# Altium PCB DIOBoard3.PcbDoc
Units mil, origin at the board's own origin, x right, y up, seen from the top; angles counter-clockwise.
Board outline 3937.01 x 5905.51 mil, 2 copper layers (Top Layer, Bottom Layer); 9 components, 110 nets, 54 pads, 9 vias.
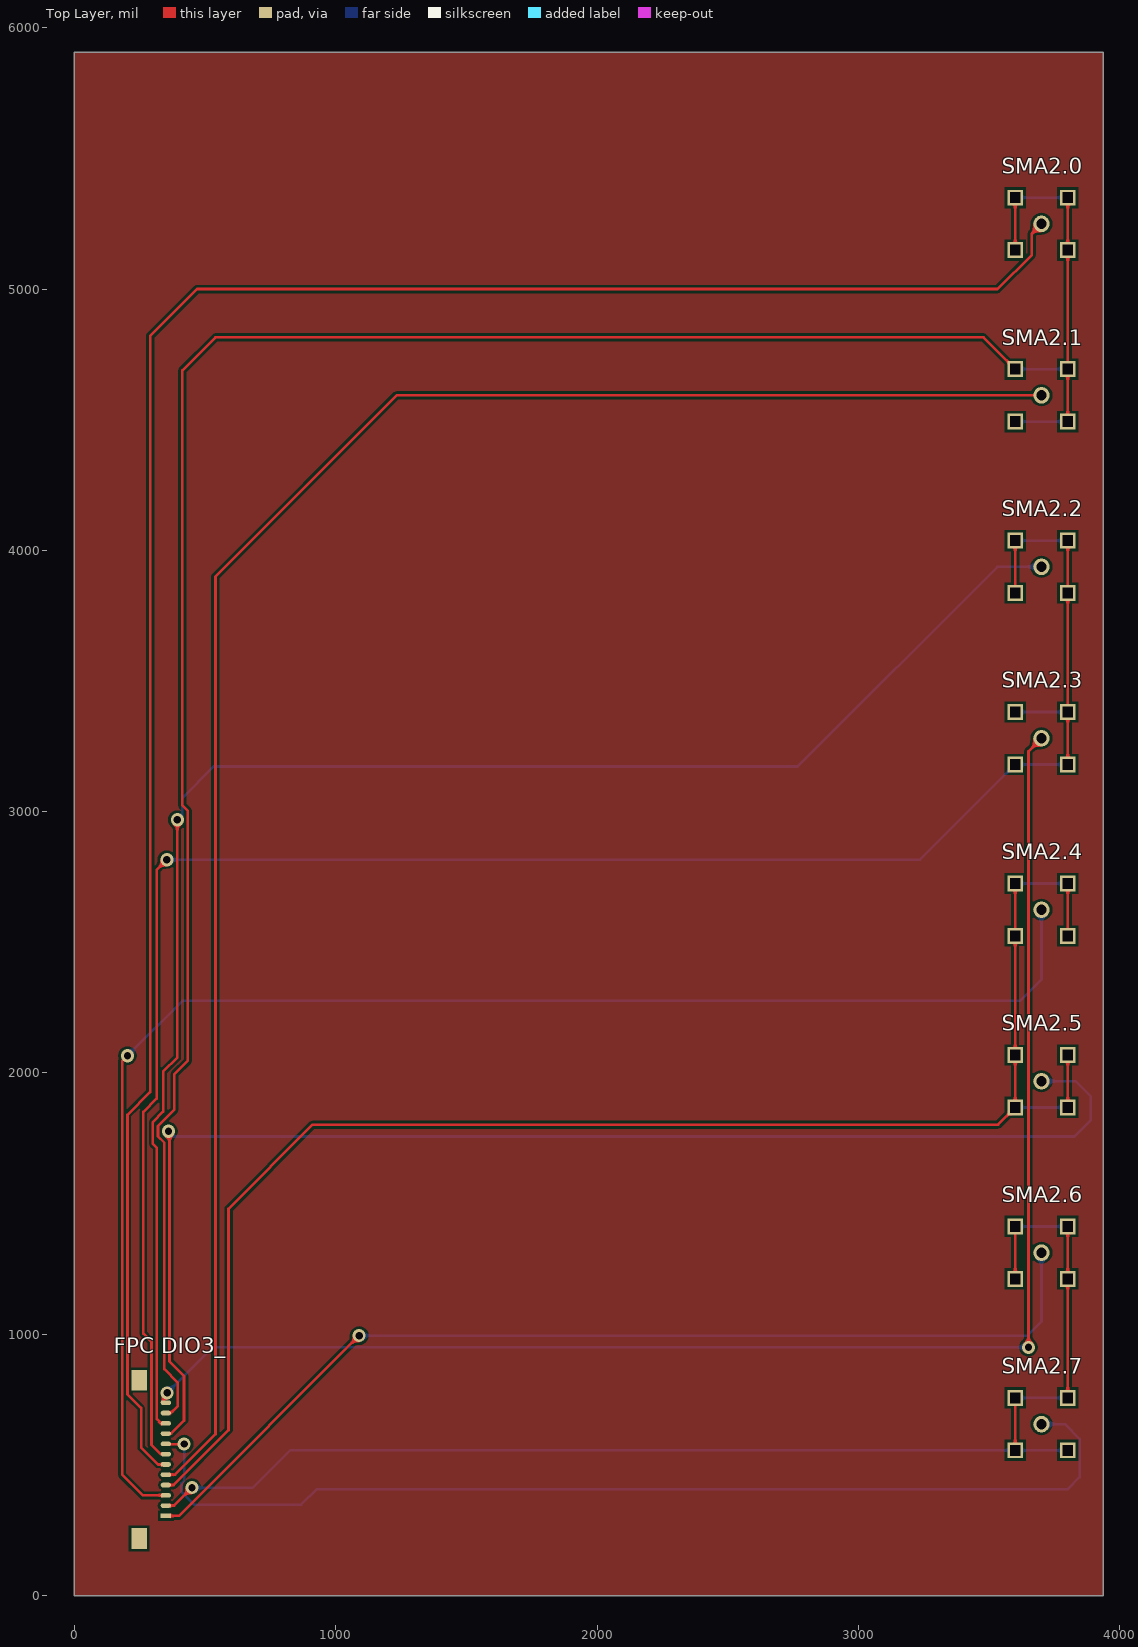
[diagram p0: Top Layer view]
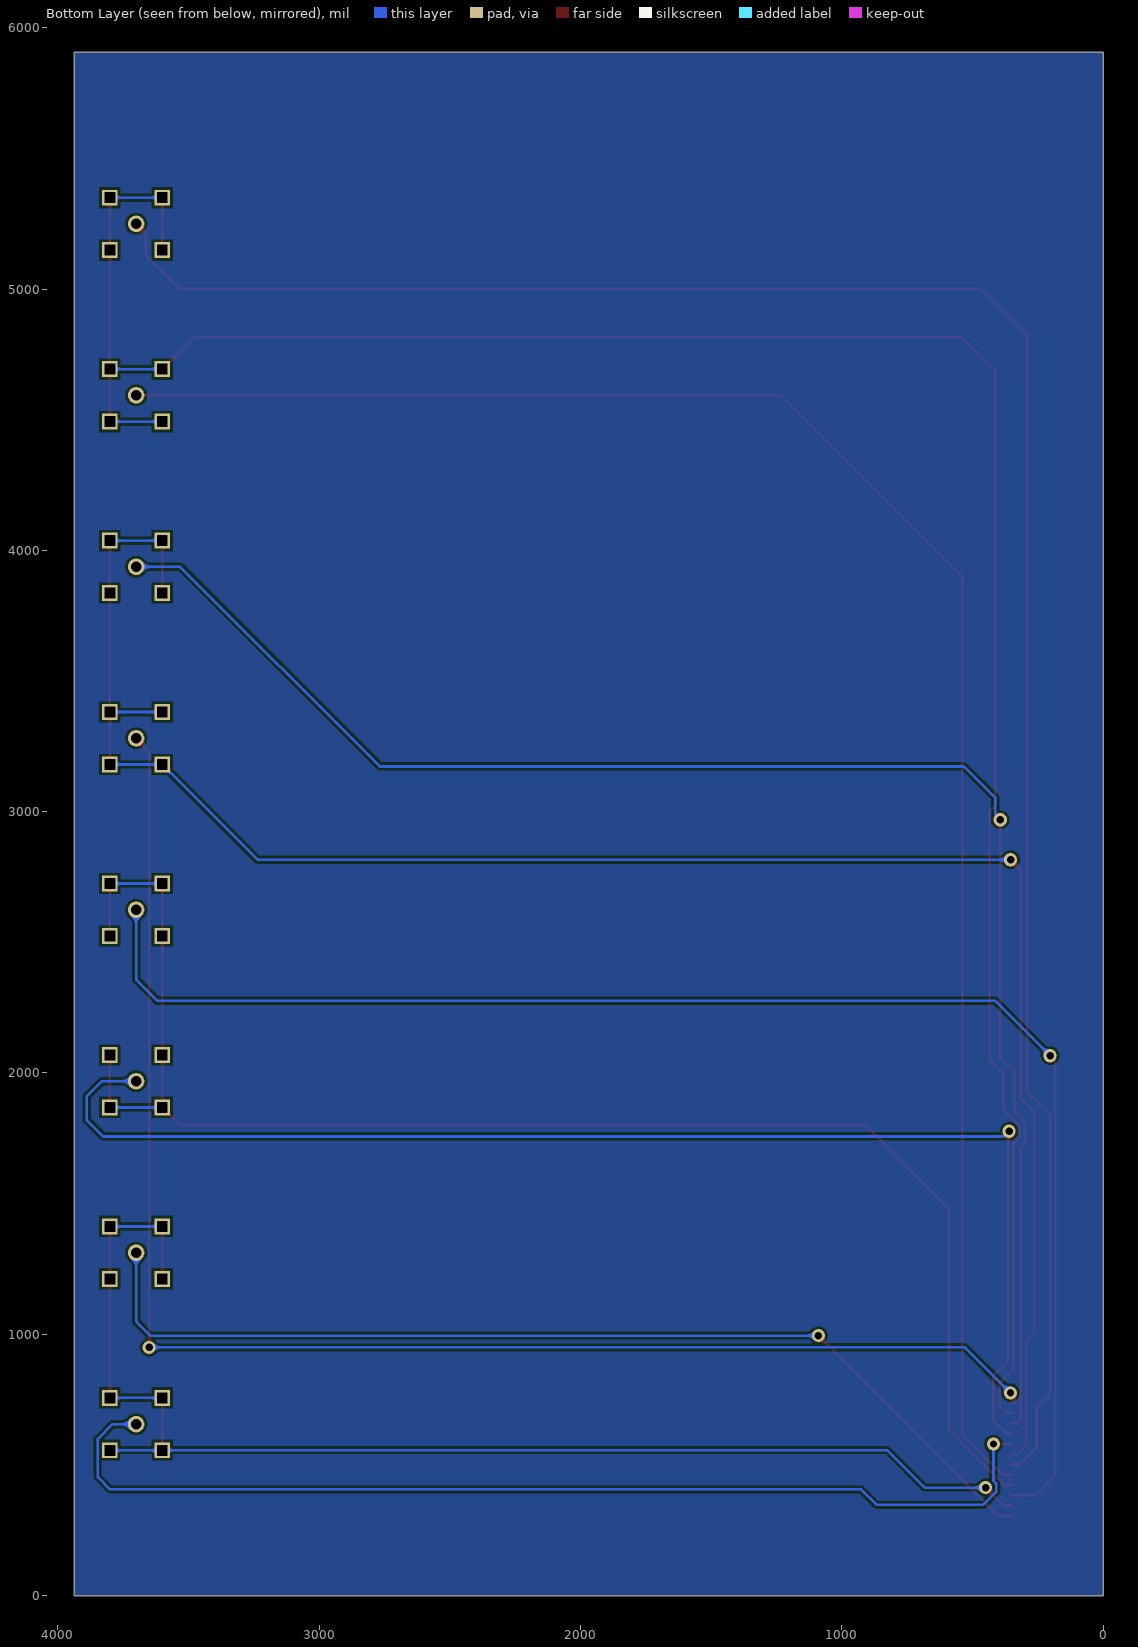
[diagram p1: Bottom Layer view, seen from below]

## Layer stack, top to bottom
Top Solder: solder mask 0.4, Solder Resist, Dk 3.5
Top Layer: signal copper 1.4
Dielectric 1: dielectric 12.6, FR-4, Dk 4.8
Bottom Layer: signal copper 1.4
Bottom Solder: solder mask 0.4, Solder Resist, Dk 3.5

## Board outline
0,0 3937.01,0 3937.01,5905.51 0,5905.51

## Design rules (kind name [scope] priority, off if disabled: settings)
Clearance [All] p1: gap=10 ignorepadtopadclearanceinfootprint=FALSE except(0: Arc-Hole Track-Hole SMDPad-Hole THPad-Hole Via-Hole Fill-Hole Poly-Hole Region-Hole Text-Hole)
PolygonConnect [All] p1: connectstyle=Relief reliefconductorwidth=10 reliefentries=4 polygonreliefangle="90 Angle" airgapwidth=10
RoutingVias [All] p1: holewidth=28 width=50 viastyle="Through Hole" minholewidth=28 minwidth=50 maxholewidth=28 maxwidth=50
SolderMaskExpansion [All] p1: expansion=4
Width [All] p1: maxlimit=10 minlimit=10 preferedwidth=10
30 further rules are at their usual default settings.

## Components (designator, comment, footprint, x,y, rotation, side; value= is the part's Value field where it differs from the comment)
"FPC DIO3_" "FPC socket 12 pin" "FPC 12pin" 350,305.12 r180 top
SMA2.0 "SMA" SMA 3700.78,5249.33 r0 top
SMA2.1 "SMA" SMA 3700.78,4593.16 r0 top
SMA2.2 "SMA" SMA 3700.78,3937 r0 top
SMA2.3 "SMA" SMA 3700.78,3280.83 r0 top
SMA2.4 "SMA" SMA 3700.78,2624.67 r0 top
SMA2.5 "SMA" SMA 3700.78,1968.5 r0 top
SMA2.6 "SMA" SMA 3700.78,1312.34 r0 top
SMA2.7 "SMA" SMA 3700.78,656.17 r0 top

## Footprints (in the part's own frame and the unit in brackets; to place one, negate y for a bottom-side part, rotate by r counter-clockwise, add the part's x,y. Pads: shape width x height; smd on the part's side, far side on the other; paste and mask are expansions set on the pad)
"FPC 12pin" [mm]
  rect 1x0.45 smd: 1(0,0)
  oval 1x0.45 smd: 2(0,-1) 3(0,-2) 4(0,-3) 5(0,-4) 6(0,-5) 7(0,-6) 8(0,-7) 9(0,-8) 10(0,-9) 11(0,-10) 12(0,-11)
  rect 1.5x2 smd: 13(2.6,-13.2) 14(2.6,2.2)
SMA [mm]
  round 1.6 hole 1: 1(0,0)
  rect 1.524x1.524 hole 1 square: 2(-2.55,-2.55) 2(-2.55,2.55) 2(2.55,-2.55) 2(2.55,2.55)

## Via types
v1: diameter 50, hole 28, Top Layer to Bottom Layer, 9 vias

## Nets (pads, with @x,y where several pads share a name; then routed paths per layer and width w, separated by ;. In a path a pad name is that pad's centre, name@x,y a point inside that pad or via, vN(x,y) a via of type N, cw(c..) or ccw(c..) an arc to the next point about the centre after c; other vN are vias at no path point)
Net5V_1: 
Net5V_2: 
NetC1_1: 
NetC1_2: 
NetC3_1: 
NetC3_2: 
NetC5_1: 
NetC5_2: 
NetC7_1: 
NetC7_2: 
"NetFPC AI1_1": 
"NetFPC AI1_2": 
"NetFPC AI1_3": 
"NetFPC AI1_4": 
"NetFPC AI1_5": 
"NetFPC AI1_6": 
"NetFPC AI1_7": 
"NetFPC AI1_8": 
"NetFPC AI1_9": 
"NetFPC AI1_10": 
"NetFPC AI1_11": 
"NetFPC AI1_12": 
"NetFPC AI2_1": 
"NetFPC AI2_2": 
"NetFPC AI2_3": 
"NetFPC AI2_4": 
"NetFPC AI2_5": 
"NetFPC AI2_6": 
"NetFPC AI2_7": 
"NetFPC AI2_8": 
"NetFPC AI2_9": 
"NetFPC AI2_10": 
"NetFPC AI2_11": 
"NetFPC AI2_12": 
"NetFPC AO_1": 
"NetFPC AO_2": 
"NetFPC AO_3": 
"NetFPC AO_4": 
"NetFPC DIO1_1": 
"NetFPC DIO1_2": 
"NetFPC DIO1_3": 
"NetFPC DIO1_4": 
"NetFPC DIO1_5": 
"NetFPC DIO1_6": 
"NetFPC DIO1_7": 
"NetFPC DIO1_8": 
"NetFPC DIO1_9": 
"NetFPC DIO1_10": 
"NetFPC DIO1_11": 
"NetFPC DIO1_12": 
"NetFPC DIO2_1": 
"NetFPC DIO2_2": 
"NetFPC DIO2_3": 
"NetFPC DIO2_4": 
"NetFPC DIO2_5": 
"NetFPC DIO2_6": 
"NetFPC DIO2_7": 
"NetFPC DIO2_8": 
"NetFPC DIO2_9": 
"NetFPC DIO2_10": 
"NetFPC DIO2_11": 
"NetFPC DIO2_12": 
"NetFPC DIO2__1": 
"NetFPC DIO2__2": 
"NetFPC DIO2__3": 
"NetFPC DIO2__5": 
"NetFPC DIO2__7": 
"NetFPC DIO2__8": 
"NetFPC DIO2__9": 
"NetFPC DIO2__10": 
"NetFPC DIO2__11": 
"NetFPC DIO2__12": 
"NetFPC DIO3_1": 
"NetFPC DIO3_2": 
"NetFPC DIO3_3": 
"NetFPC DIO3_4": 
"NetFPC DIO3_5": 
"NetFPC DIO3_6": 
"NetFPC DIO3_7": 
"NetFPC DIO3_8": 
"NetFPC DIO3_9": 
"NetFPC DIO3_10": 
"NetFPC DIO3_11": 
"NetFPC DIO3_12": 
"NetFPC DIO3__1": "FPC DIO3_.1" SMA2.6.1 | length 3922.4
  Top Layer w10: 350,305.12 400,305.12 v1(1089.88,995)
  Bottom Layer w10: v1(1089.88,995) 3647,995 3700.78,1048.78 SMA2.6.1
"NetFPC DIO3__2": "FPC DIO3_.2" SMA2.6.2 SMA2.7.2 | length 4998.2
  Top Layer w10: 350,344.49 381.49,344.49 v1(450,413) ; SMA2.7.2@3600.39,555.78 SMA2.7.2@3600.39,756.56 ; SMA2.6.2@3600.39,1211.94 SMA2.6.2@3600.39,1412.73 ; SMA2.7.2@3801.17,756.56 3801.17,1211.94 SMA2.6.2@3801.17,1412.73
  Bottom Layer w10: v1(450,413) 683,413 826,556 3600.16,556 3600.39,555.78 SMA2.7.2@3801.17,555.78 ; SMA2.7.2@3600.39,756.56 SMA2.7.2@3801.17,756.56 ; SMA2.6.2@3600.39,1412.73 SMA2.6.2@3801.17,1412.73
"NetFPC DIO3__3": "FPC DIO3_.3" SMA2.4.1 | length 5696.6
  Top Layer w10: v1(203,2066) 183.11,2046.11 183.11,462.75 262,383.86 350,383.86
  Bottom Layer w10: v1(203,2066) 413,2276 3619,2276 3700.78,2357.78 SMA2.4.1
"NetFPC DIO3__4": "FPC DIO3_.4" SMA2.4.2 SMA2.5.2 | length 5993.1
  Top Layer w10: 350,423.23 380,423.23 590,633.23 590,1480 912,1802 3534.28,1802 3600.39,1868.11 3600.39,2068.89 3600.39,2524.27 SMA2.4.2@3600.39,2725.06 ; SMA2.5.2@3801.17,1880 SMA2.5.2@3801.17,2068.89 ; SMA2.4.2@3801.17,2524.27 SMA2.4.2@3801.17,2725.06
  Bottom Layer w10: SMA2.5.2@3600.39,1868.11 SMA2.5.2@3801.17,1868.11 ; SMA2.4.2@3600.39,2725.06 SMA2.4.2@3801.17,2725.06
"NetFPC DIO3__5": "FPC DIO3_.5" SMA2.1.1 | length 6984.5
  Top Layer w10: 350,462.6 385,462.6 540,617.6 540,856.66 540,1944 540,3900 1233.16,4593.16 SMA2.1.1
"NetFPC DIO3__6": "FPC DIO3_.6" SMA2.0.1 | length 8068.6
  Top Layer w10: 350,501.97 320,501.97 255.31,566.66 255.31,717.79 203.11,770 203.11,1840.11 290,1927 290,4820 470,5000 3532.66,5000 3663.62,5130.96 3663.62,5212.17 SMA2.0.1
"NetFPC DIO3__7": "FPC DIO3_.7" SMA2.2.2 SMA2.3.2 | length 7417.1
  Top Layer w10: 350,541.34 330,541.34 295,576.34 295,971.46 263.6,1002.86 263.6,1850.6 315,1902 315,2777 v1(354,2816) ; SMA2.2.2@3600.39,3836.6 SMA2.2.2@3600.39,4037.39 ; SMA2.3.2@3801.17,3180.44 3801.17,3381.23 3801.17,3836.6 SMA2.2.2@3801.17,4037.39
  Bottom Layer w10: v1(354,2816) 3235.95,2816 3600.39,3180.44 SMA2.3.2@3801.17,3180.44 ; SMA2.3.2@3600.39,3381.23 SMA2.3.2@3801.17,3381.23 ; SMA2.2.2@3600.39,4037.39 SMA2.2.2@3801.17,4037.39
"NetFPC DIO3__8": "FPC DIO3_.8" SMA2.7.1 | length 4074.5
  Top Layer w10: 350,580.71 350.71,580 v1(420,580)
  Bottom Layer w10: v1(420,580) 420,439.57 410,429.57 410,396.43 458.43,348 868,348 927,407 3800,407 3847,454 3847,600 3790.83,656.17 SMA2.7.1
"NetFPC DIO3__9": "FPC DIO3_.9" SMA2.5.1 | length 5090
  Top Layer w10: 350,620.08 370,620.08 419.64,669.72 419.64,840.17 364,895.82 364,1773 v1(360,1777)
  Bottom Layer w10: v1(360,1777) 380,1757 3827,1757 3890,1820 3890,1910 3831.5,1968.5 SMA2.5.1
"NetFPC DIO3__10": "FPC DIO3_.10" SMA2.2.1 | length 6126.2
  Top Layer w10: 350,659.45 330.86,659.45 315.31,675 315.31,735.53 315,735.84 315,1714 300,1729 300,1812 340,1852 340,2005 394,2059 v1(394,2969)
  Bottom Layer w10: v1(394,2969) 413,2988 413,3053 533,3173 2768,3173 3532,3937 SMA2.2.1
"NetFPC DIO3__11": "FPC DIO3_.11" SMA2.0.2 SMA2.1.2 | length 9056.9
  Top Layer w10: 350,698.82 369.51,698.82 395.31,724.63 395.31,816 344,867.31 344,1733 320,1757 320,1797 382,1859 382,1995 434,2047 434,3003 413,3024 413,4688 540,4815 3478.94,4815 SMA2.1.2@3600.39,4693.56 ; SMA2.0.2@3600.39,5148.94 SMA2.0.2@3600.39,5349.72 ; SMA2.1.2@3801.17,4492.77 3801.17,4693.56 3801.17,5148.94 SMA2.0.2@3801.17,5349.72
  Bottom Layer w10: SMA2.1.2@3600.39,4492.77 SMA2.1.2@3801.17,4492.77 ; SMA2.1.2@3600.39,4693.56 SMA2.1.2@3801.17,4693.56 ; SMA2.0.2@3600.39,5349.72 SMA2.0.2@3801.17,5349.72
"NetFPC DIO3__12": "FPC DIO3_.12" SMA2.3.1 | length 5773.5
  Top Layer w10: 350,738.19 340,738.19 340,761 v1(355,776) ; v1(3651,950) 3651,3231.05 SMA2.3.1
  Bottom Layer w10: v1(355,776) 529,950 v1(3651,950)
"NetFPC DIO 1__1": 
"NetFPC DIO 1__2": 
"NetFPC DIO 1__3": 
"NetFPC DIO 1__4": 
"NetFPC DIO 1__5": 
"NetFPC DIO 1__6": 
"NetFPC DIO 1__7": 
"NetFPC DIO 1__8": 
"NetFPC DIO 1__9": 
"NetFPC DIO 1__10": 
"NetFPC DIO 1__11": 
"NetFPC DIO 1__12": 
"NetFPC Other_1": 
"NetFPC Other_2": 
pads on no net: "FPC DIO3_.13" "FPC DIO3_.14"

## Polygon pours and split planes (outlines as drawn)
no net on Top Layer "Top Layer-No Net" (solid, pour order 0): 0,5905.51 3937.01,5905.51 3937.01,0 0,0
no net on Bottom Layer "Bottom Layer-No Net" (solid, pour order 2): 0,5905.51 3937.01,5905.51 3937.01,0 0,0

## Silkscreen, mask and mechanical layers (free items; w line width, h text height)
Drill Drawing:
  the board outline again, w10
  text "DIO Board 3 V1.0 Ying" at 2650,70 h60